# Altium PCB PCB1.PcbDoc
Units mil, origin at the board's own origin, x right, y up, seen from the top; angles counter-clockwise.
Board outline 3327 x 1931 mil, 2 copper layers (Top Layer, Bottom Layer); 50 components, 21 nets, 116 pads, 0 vias.
Unrouted connection lines stored in the file: 1.
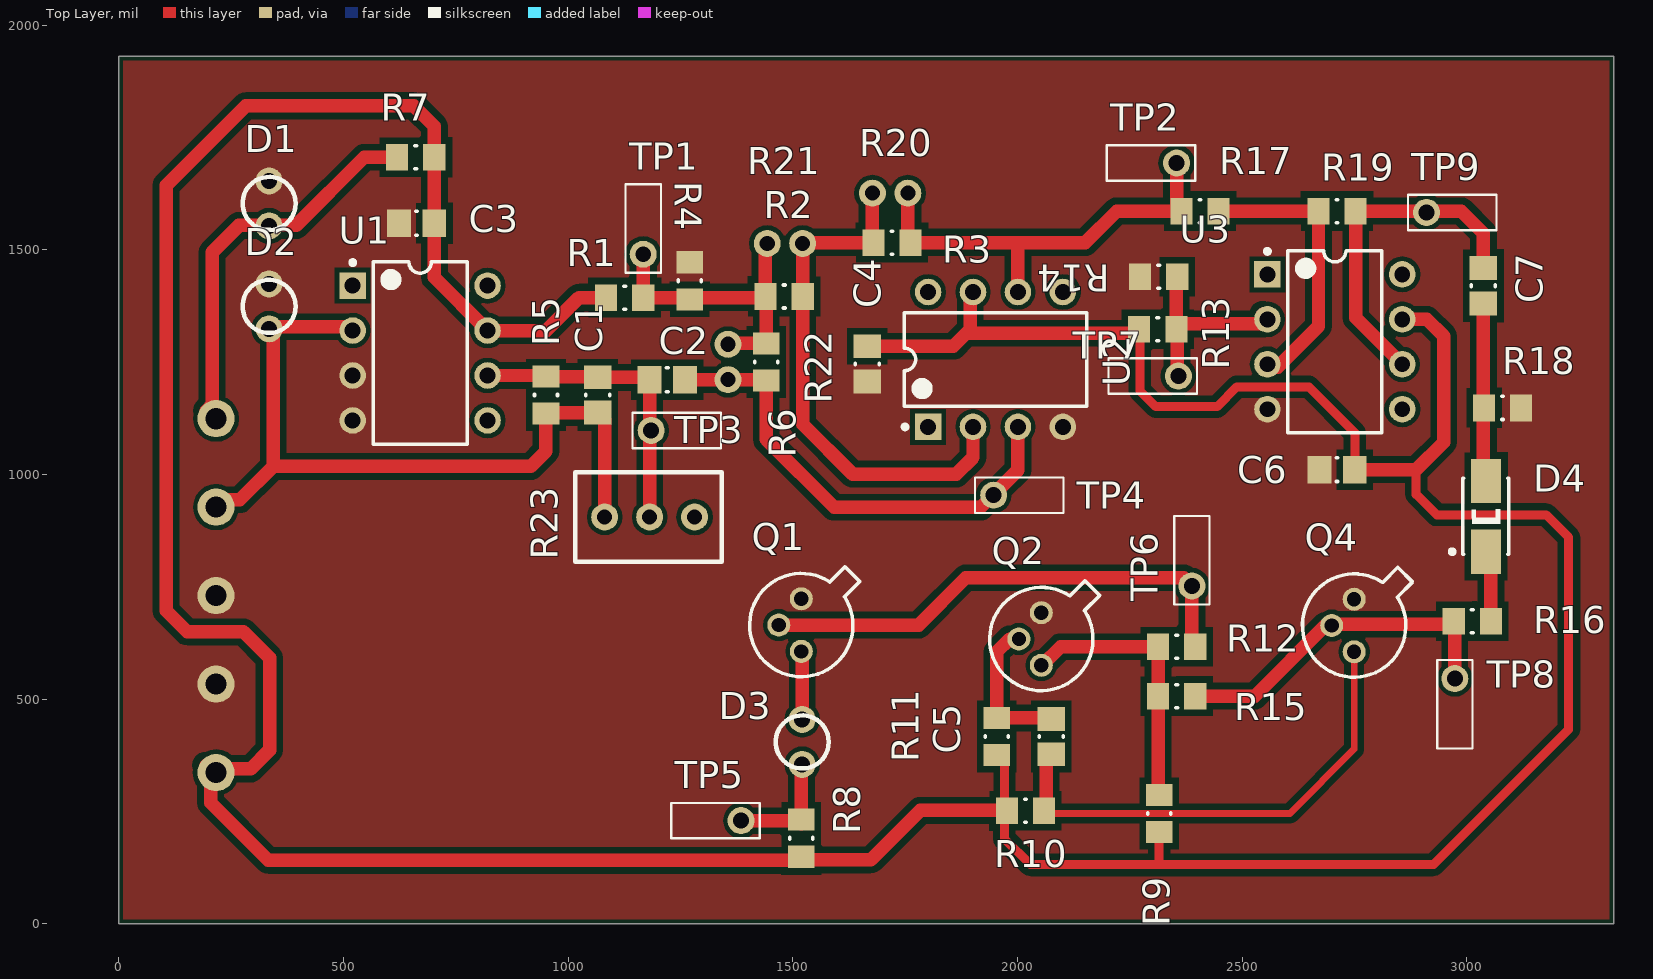
[diagram p0: Top Layer view]
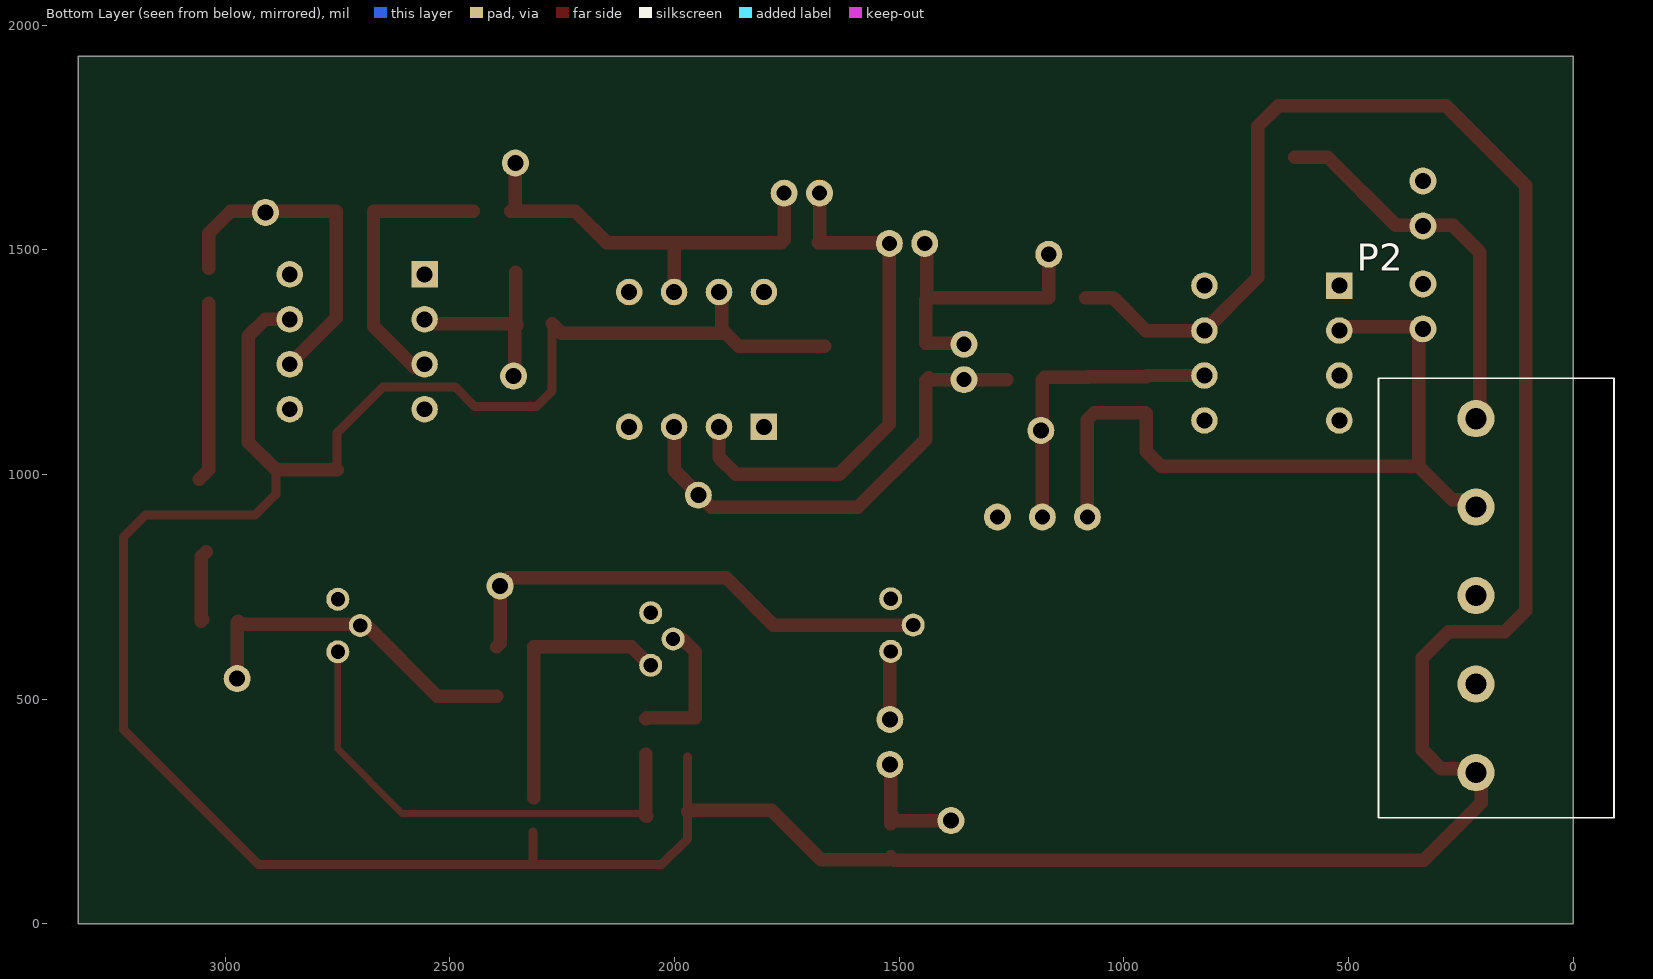
[diagram p1: Bottom Layer view, seen from below]

## Layer stack, top to bottom
Top Solder: solder mask 0.4, Solder Resist, Dk 3.5
Top Layer: signal copper 1.4
Dielectric 1: dielectric 12.6, FR-4, Dk 4.8
Bottom Layer: signal copper 1.4
Bottom Solder: solder mask 0.4, Solder Resist, Dk 3.5

## Board outline
0,0 0,1931 3327,1931 3327,0

## Design rules (kind name [scope] priority, off if disabled: settings)
BoardOutlineClearance [All] p1: gap=10
Clearance [All] p1: gap=15 except(10: THPad-Poly THPad-Region)
PolygonConnect [All] p1: connectstyle=Direct reliefconductorwidth=10 reliefentries=4 polygonreliefangle="90 Angle" airgapwidth=10
RoutingVias [All] p1: holewidth=28 width=50 viastyle="Through Hole" minholewidth=28 minwidth=50 maxholewidth=28 maxwidth=50
SolderMaskExpansion [All] p1: expansion=4
Width [All] p1: maxlimit=50 minlimit=15 preferedwidth=30
30 further rules are at their usual default settings.

## Classes and differential pairs
component class Sheet2: C5 C6 C7 D3 D4 Q1 Q2 Q4 R8 R9 R10 R11 R12 R13 R14 R15 R16 R17 R18 R19 TP5 TP6 TP7 TP8 TP9 U3
component class Sheet1: C1 C2 C3 C4 D1 D2 R1 R2 R3 R4 R5 R6 R7 R20 R21 R22 R23 TP1 TP2 TP3 TP4 U1 U2

## Components (designator, comment, footprint, x,y, rotation, side; value= is the part's Value field where it differs from the comment)
C1 "50 nF" CAPC0805(2012)75_M 1066,1177 r270 top
C2 "2 uF" CAPC0805(2012)75_M 1221,1211 r180 top
C3 "CAP 0.5pF 50V 0805(2012)" CAPC0805(2012)75_M 663,1559 r0 top
C4 "CAP 0.5pF 50V 0805(2012)" CAPC0805(2012)75_M 1666,1246 r90 top
C5 "2 uF" CAPC0805(2012)75_M 2075,417 r270 top
C6 "CAP 0.5pF 50V 0805(2012)" CAPC0805(2012)75_M 2711,1011 r0 top
C7 "2 uF" CAPC0805(2012)75_M 3036,1420 r270 top
D1 "photodiode" 3mm_diode 335,1553 r90 top
D2 "photodiode" 3mm_diode 335,1424 r270 top
D3 "5mm_LED" 3mm_diode 1521,355 r90 top
D4 "" DIOD-S1M-13-F-SMA-2_V 3042,907 r270 top
P2 "Comment" KONV-KMRJ103-5-508-6_V 217,829 r90 bottom
Q1 "2N2222" MLTC-TO-18-3 1519,665 r270 top
Q2 "2N2222" MLTC-TO-18-3 2053,634 r270 top
Q4 "2N2222" MLTC-TO-18-3 2749,664 r270 top
R1 "? oHm" RESC0805(2012)_M 1126,1393.6 r180 top
R2 "? Ohm" RESC0805(2012)_M 1481,1396 r0 top
R3 "? Ohm" RESC0805(2012)_M 1721,1516 r0 top
R4 "? Ohm" RESC0805(2012)_M 1271,1431 r270 top
R5 "500 kOhm" RESC0805(2012)_M 951,1177 r90 top
R6 "? Ohm" RESC0805(2012)_M 1441,1250.29 r90 top
R7 "4R3 5% 0805(2012)" RESC0805(2012)_M 661,1706 r0 top
R8 "? Ohm" RESC0805(2012)_M 1519,191 r90 top
R9 "? Ohm" RESC0805(2012)_M 2315,246 r90 top
R10 "? Ohm" RESC0805(2012)_M 2018,252 r0 top
R11 "? Ohm" RESC0805(2012)_M 1954,417 r90 top
R12 "? Ohm" RESC0805(2012)_M 2354,617 r0 top
R13 "? Ohm" RESC0805(2012)_M 2312,1323 r180 top
R14 "? Ohm" RESC0805(2012)_M 2314,1440 r180 top
R15 "? Ohm" RESC0805(2012)_M 2354,507 r180 top
R16 "? Ohm" RESC0805(2012)_M 3012,674 r180 top
R17 "? Ohm" RESC0805(2012)_M 2406,1586 r180 top
R18 "" RESC0805(2012)_M 3079,1148 r0 top
R19 "? Ohm" RESC0805(2012)_M 2711,1586 r180 top
R20 "axial-through-hole" Axial_resistor 1677.26,1626 r0 top
R21 "axial-through-hole" Axial_resistor 1443.26,1514 r0 top
R22 "axial-through-hole" Axial_resistor 1356,1211 r90 top
R23 "5Mohm Potentiometer" 5k_pot 1081.63,905.37 r0 top
TP1 "TP-TH-C-152-H90" TP-TH-C-152-H90 1167.34,1490 r90 top
TP2 "TP-TH-C-152-H90" TP-TH-C-152-H90 2354,1693 r180 top
TP3 "TP-TH-C-152-H90" TP-TH-C-152-H90 1185,1098 r0 top
TP4 "TP-TH-C-152-H90" TP-TH-C-152-H90 1947,954 r0 top
TP5 "TP-TH-C-152-H90" TP-TH-C-152-H90 1385,230 r180 top
TP6 "TP-TH-C-152-H90" TP-TH-C-152-H90 2388,752 r90 top
TP7 "TP-TH-C-152-H90" TP-TH-C-152-H90 2358,1219 r180 top
TP8 "TP-TH-C-152-H90" TP-TH-C-152-H90 2973,546 r270 top
TP9 "TP-TH-C-152-H90" TP-TH-C-152-H90 2910,1583 r0 top
U1 "MCP601A" ADI-Q-8 671,1270.24 r0 top
U2 "MCP601A" ADI-Q-8 1951,1256 r90 top
U3 "MCP601A" ADI-Q-8 2706,1295.24 r0 top

## Footprints (in the part's own frame and the unit in brackets; to place one, negate y for a bottom-side part, rotate by r counter-clockwise, add the part's x,y. Pads: shape width x height; smd on the part's side, far side on the other; paste and mask are expansions set on the pad)
3mm_diode [mil]
  round 60 hole 35.43: 1(0,0) 2(100,0)
  silkscreen extent -9,-59 109,59
5k_pot [mil] "3296W-1-505LF"
  round 60 hole 33.46: 1(0,0) 2(100,0) 3(200,0)
  silkscreen extent -65,-100 260,100
ADI-Q-8 [mm] "DIP, 8-Leads, Body 10.29x6.73mm, Pitch 2.54mm"
  rect 1.5x1.5 hole 0.9: 1(-3.81,3.81)
  round 1.5 hole 0.9: 2(-3.81,1.27) 3(-3.81,-1.27) 4(-3.81,-3.81) 5(3.81,-3.81) 6(3.81,-1.27) 7(3.81,1.27) 8(3.81,3.81)
  silkscreen extent -3.93,-5.15 2.65,5.23, body extent -3.95,-5.15 3.95,5.15, height 5.08
Axial_resistor [mil] "through-hole"
  round 60 hole 33.46: 1(0,0) 2(78.74,0)
CAPC0805(2012)75_M [mm] "Chip Capacitor, Body 2.0x1.2mm, Height 0.75mm, IPC Low Density"
  rect 1.35x1.55 smd: 1(-1,0) 2(1,0)
  silkscreen extent -0.05,-0.67 0.05,0.67, body extent -1.1,-0.72 1.1,0.72, height 0.75
DIOD-S1M-13-F-SMA-2_V [mm] "SMD, 2-Leads, Body 4.3x2.605mm, Height 2.3mm"
  rect 2.5x1.7 smd: 1(-2,0) 2(2,0)
  silkscreen extent -2.15,-2.03 2.15,1.3, body extent -2.15,-1.3 2.15,1.3, height 2.3
KONV-KMRJ103-5-508-6_V [mm] "Socket, 6-way, 5.0mm Pitch Terminal Block"
  round 2.1 hole 1.2: 1(-12.5,0) 2(-7.5,0) 3(-2.5,0) 4(2.5,0) 5(7.5,0)
  silkscreen extent -15.05,-7.8 9.78,5.5
MLTC-TO-18-3 [mm] "TO-18, 3-Leads"
  round 1.3 hole 0.8: 1(-1.485,0) 2(0,-1.27) 3(1.485,0)
  silkscreen extent -3.29,-2.92 2.92,3.29, body extent -3.29,-2.93 2.93,3.29, height 5.33
RESC0805(2012)_M [mm] "Chip Resistor, Body 2.0x1.3mm, IPC Low Density"
  rect 1.25x1.5 smd: 1(-1.05,0) 2(1.05,0)
  silkscreen extent -0.05,-0.65 0.05,0.65, body extent -1.1,-0.67 1.1,0.67, height 0.7
TP-TH-C-152-H90 [mil] "Test Point, Through Hole, Hole Size 0.9mm, PCB Mount with Silkscreen Box"
  round 60 hole 35.43: 1(0,0)
  silkscreen extent -41,-39 156,39

## Part data
C1 C2 C3 C4 C5 C6 C7: library part CMP-1036-00018-1, "CAP 0.5pF 50V ±0.1pF 0805 (2012 Metric) Thickness 0.75mm SMD"
D4: library part CMP-0639-00001-1, "Surface Mount Glass Passivated Rectifier, 1000V, 1 A, -65 to 125 degC, 2-Pin SMA Package, RoHS, Tape and Reel"
Q1 Q2 Q4: library part CMP-2000-05237-1, "Low Power Bipolar NPN Transistor, 30 V, -65 to 200 degC, 3-Pin TO-18, RoHS, Bulk"
R1 R2 R3 R4 R5 R6 R7 R8 R9 R10 R11 R12 R13 R14 R15 R16 R17 R18 R19: library part CMP-1013-00017-1, "4R3 0.125W 5% 0805 (2012 Metric)  SMD"
R20 R21 R22: "through-hole"
R23: "3296W-1-505LF"
TP1 TP2 TP3 TP4 TP5 TP6 TP7 TP8 TP9: library part CMP-0484-00003-2, "Test Point, Through Hole, Hole Size 0.9 mm, PCB Mount with Silkscreen Box"
U1 U2 U3: library part CMP-0384-00317-1, "Single Channel Low Power Operational Amplifier, 880 MHz BW, 1 KV/us SR, Military, 8-pin DIP (Q-8), Tube"

## Nets (pads, with @x,y where several pads share a name; then routed paths per layer and width w, separated by ;. In a path a pad name is that pad's centre, name@x,y a point inside that pad or via, vN(x,y) a via of type N, cw(c..) or ccw(c..) an arc to the next point about the centre after c; other vN are vias at no path point)
5V: C3.2 C4.2 C6.2 P2.1 R1.2 R7.2 R8.1 R9.1 R10.1 R11.1 R13.2 U1.7 U2.7 U3.7 | length 9619.3
  Top Layer w20: R11.1@1971,372 1971,190 2029,132 2315,132 ; R13.2@2272.26,1335 2272.26,1186.74 2308,1151 2444,1151 2488,1195 2648,1195 2750.37,1092.63 C6.2 ; R9.1 2315,132 ; 2887,1011 2887,956 2933,910 3176,910 3226,860 3226,433 2925,132 2315,132
  Top Layer w30: P2.1@194.7,353.3 205,353.3 P2.1@205,345 ; R1.2 1024.6,1393.6 951.24,1320.24 U1.7 702.34,1438.9 R7.2 702.34,1774.66 657,1820 283,1820 106,1643 106,697 153,650 278,650 336,592 336,387 294,345 P2.1@205,345 ; R8.1 R8.1@1523,145.66 ; C4.2 1857.37,1285.37 1895,1323 ; U2.7 1895,1400 1895,1323 ; R10.1@1970.66,250 1967.66,253 1784,253 1674,143 1525.66,143 R8.1@1523,145.66 ; R13.2@2272.26,1335 2251.26,1314 1895,1314 1895,1323 ; C6.2 2887,1011 2948,1072 2948,1308 2910.76,1345.24 U3.7 ; P2.1@205,345 205,270 333,142 1511.34,142 1520.5,144.88 R8.1@1523,145.66
GND: C3.1 C4.1 C6.1 D1.2 D2.1 P2.2 P2.3 Q1.1 Q2.1 Q4.1 R4.1 R14.2 R18.2 U1.3 U1.4 U2.4 U3.4
NetC1_1: C1.1 C2.2 R5.2 R23.2 TP3.1 U1.6 | length 670.1
  Top Layer w30: U1.6 948.73,1220.24 951,1217.97 1079.03,1217.97 1081,1216 1176.63,1216 C2.2 R23.2
NetC1_2: C1.2 D2.2 P2.4 R5.1 R23.1 U1.2 | length 1725.2
  Top Layer w30: P2.4@205,943.85 269.85,943.85 344,1018 ; D2.2 D2.2@344,1315 ; U1.2 512.24,1329 358,1329 D2.2@344,1315 ; R23.1 1081.63,1122 C1.2 952.97,1137.63 R5.1 951,1052 917,1018 344,1018 ; 344,1018 D2.2@344,1315
NetC2_1: C2.1 R6.1 R22.1 TP4.1 U2.3 | length 1068.9
  Top Layer w30: C2.1 R22.1 1430.37,1211 1434.66,1215.29 R6.1 1441,1078 1592,927 1918,927 2001,1010 U2.3
NetC5_1: C5.1 Q2.2 R11.2 | length 318.8
  Top Layer w30: Q2.2 1982.54,634 1954,605.46 R11.2 2062.03,458.34 C5.1@2064,456.37
NetC5_2: C5.2 Q4.3 R10.2 | length 1099.9
  Top Layer w15: R10.2@2064,246 2606,246 2749,389 Q4.3
  Top Layer w30: R10.2@2062,239.34 2064,241.34 2064,246 C5.2@2064,377.63
NetC7_1: C7.1 R19.1 TP9.1 U3.6 | length 765.3
  Top Layer w30: U3.6 2752.34,1348.9 R19.1 2987,1586 3036,1537 C7.1
NetC7_2: C7.2 D4.1 R18.1 | length 399.6
  Top Layer w30: C7.2 3036,1010.74 D4.1@3057,989.74
NetC8_2: R1.1 R2.1 R4.2 R6.2 R21.1 R22.2 TP1.1 | length 684.8
  Top Layer w30: TP1.1@1155,1490 TP1.1 R1.1@1167.34,1396 ; R1.1 1437.98,1393.6 1438.55,1393.36 R2.1@1439.26,1393.06 ; R22.2 1357.89,1291.63 R6.2 1441,1388.32 R2.1@1439.26,1393.06 ; R21.1@1439.26,1512 R2.1@1439.26,1393.06
NetC9_2: R13.1 R14.1 TP7.1 U3.2 | length 466.6
  Top Layer w30: R14.1@2353,1450 R13.1@2353,1335 ; TP7.1 2354.94,1222.06 R13.1@2354.94,1335 ; U3.2@2545.24,1356 U3.2 2545.76,1335 R13.1@2354.94,1335 ; R13.1@2353,1335 R13.1@2354.94,1335 ; R13.1@2353,1335 2353,1331.06 2351,1331.06 2351,1335 R13.1@2353,1335
NetD1_1: D1.1 P2.5 R7.1 | length 857.2
  Top Layer w30: P2.5@195,1141.7 208,1154.7 208,1494 268,1554 395,1554 547,1706 R7.1
NetD3_1: D3.1 R8.2 TP5.1 | length 288.7
  Top Layer w30: TP5.1@1388.57,233.57 TP5.1 1505.34,230 1519,243.66 R8.2 ; R8.2@1519.34,223 1519.34,353.34 D3.1
NetD3_2: D3.2 Q1.3 | length 152.4
  Top Layer w30: Q1.3 1521,604.54 D3.2
NetD4_2: D4.2 R16.1 | length 163.7
  Top Layer w30: D4.2 3053.34,816.92 R16.1 R16.1@3050,677.34
NetQ1_2: Q1.2 R12.2 TP6.1 | length 1108
  Top Layer w30: Q1.2 1780,665 1885,770 2370,770 TP6.1 2388,624.34 R12.2
NetQ2_3: Q2.3 R9.2 R12.1 R15.2 | length 612.8
  Top Layer w30: Q2.3 2054.54,575.54 2096,617 R12.1 R15.2 R9.2@2312.66,281
NetQ4_2: Q4.2 R15.1 R16.2 TP8.1 | length 777.6
  Top Layer w30: R15.1 2528,507 2685,664 Q4.2 2701.87,666.87 2970.66,666.87 R16.2 2973,671.66 TP8.1
NetR2_2: R2.2 R3.1 R20.1 R21.2 U2.2 | length 1196.5
  Top Layer w30: R20.1 1677.26,1518.4 R3.1 1511,1516 1522,1505 1522,1112 1633,1001 1864,1001 1901,1038 U2.2
NetR3_2: R3.2 R17.2 R20.2 TP2.1 U2.6 | length 960.9
  Top Layer w30: R20.2 1756,1522.34 R3.2 2001,1516 ; U2.6 2001,1516 ; TP2.1 R17.2@2354,1586 ; R17.2 R17.2@2354,1586 ; 2001,1516 2151,1516 2221,1586 R17.2@2354,1586
NetR17_1: R17.1 R19.2 U3.3 | length 607.6
  Top Layer w30: R17.1 R19.2 2669.66,1329.66 U3.3@2578.5,1238.5
pads on no net: R23.3 U1.1 U1.5 U1.8 U2.1 U2.5 U2.8 U3.1 U3.5 U3.8

## Polygon pours and split planes (outlines as drawn)
GND on Top Layer "GND" (solid, pour order 0): -95,2060 3486,2060 3486,1576 3486,-144 -95,-144

## Silkscreen, mask and mechanical layers (free items; w line width, h text height)
Mechanical 1:
  the board outline again, w10